# Altium PCB PCB-Lift_2022-01-25.pcbdoc (part 2 of 2)
Units mil, origin at the board's own origin, x right, y up, seen from the top; angles counter-clockwise.
Board outline 4947.01 x 4952.29 mil, 2 copper layers (Top Layer, Bottom Layer); 137 components, 143 nets, 538 pads, 141 vias.
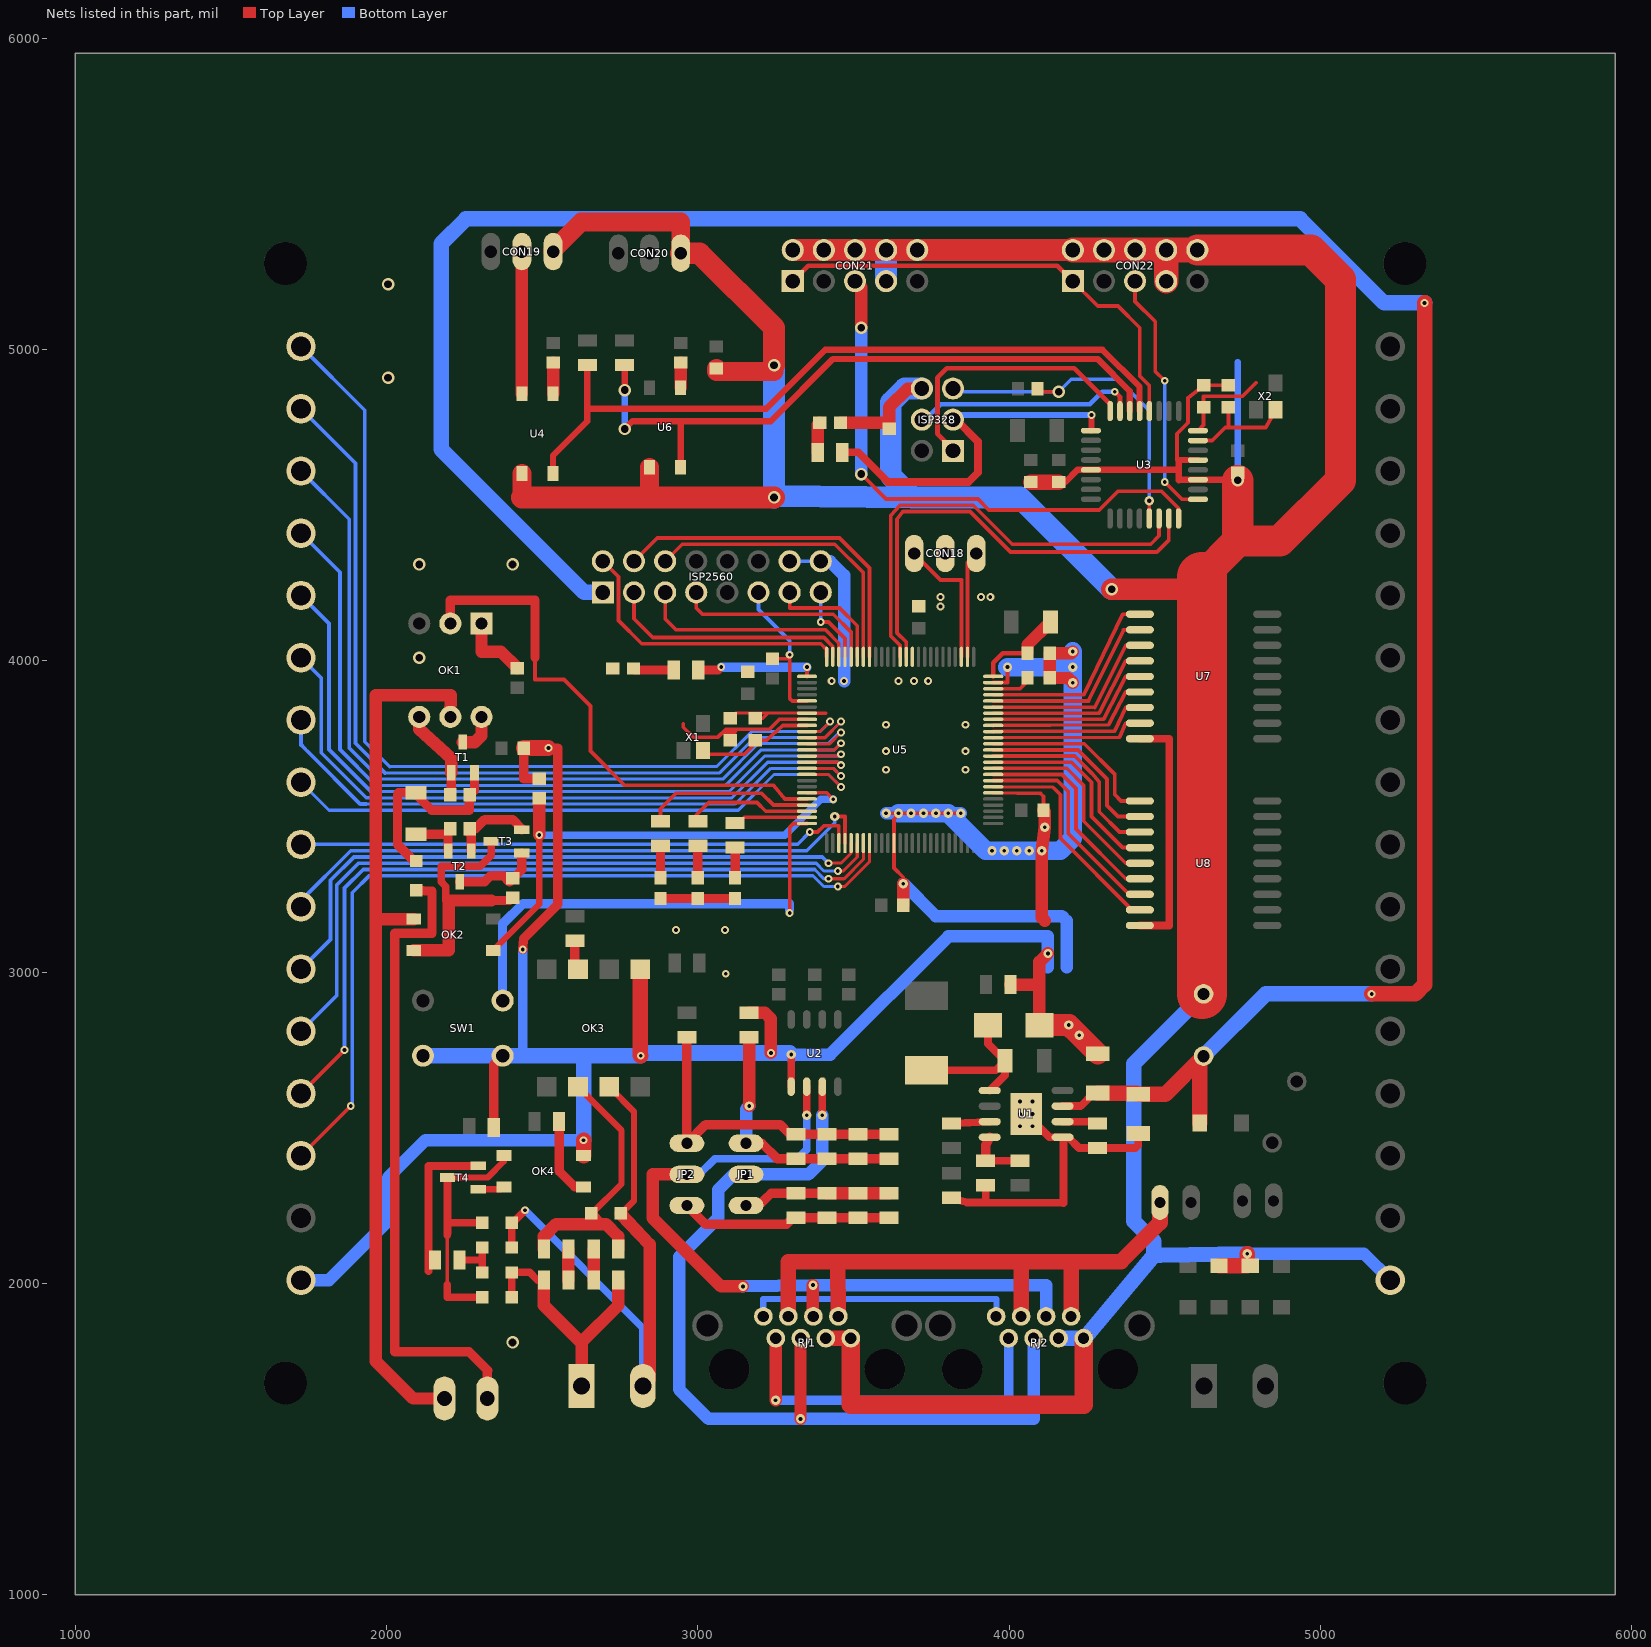
[diagram p2: the nets of this part, all layers, seen from the top]

## Via types
v1: diameter 25, hole 12, Top Layer to Bottom Layer, tented both sides, 62 vias
v2: diameter 30, hole 12, Top Layer to Bottom Layer, tented both sides, 54 vias
v3: diameter 40, hole 25, Top Layer to Bottom Layer, tented both sides, 24 vias
v4: diameter 30, hole 15, Top Layer to Bottom Layer, tented both sides, 1 vias

## Nets (pads, with @x,y where several pads share a name; then routed paths per layer and width w, separated by ;. In a path a pad name is that pad's centre, name@x,y a point inside that pad or via, vN(x,y) a via of type N, cw(c..) or ccw(c..) an arc to the next point about the centre after c; other vN are vias at no path point) (continued)
GND: C1.2 C2.1 C3.2 C5.1 C6.1 C7.1 C8.1 C9.1 C10.1 C11.1 C12.1 C13.1 C14.1 C15.1 C16.2 C17.1 C18.1 C19.1 C20.1 C21.1 C22.1 C23.1 CON8.2 CON9.1 CON18.2 CON19.3 CON20.3 CON21.2 CON21.4 CON21.6 CON21.7 CON21.8 CON21.10 CON22.2 CON22.4 CON22.6 CON22.7 CON22.8 CON22.10 D1.2 D3.2 D6.2 ISP328.6 ISP2560.14 ISP2560.16 LED1.2 LED2.2 LED3.2 LED4.2 LED5.2 OK3.5 OK4.2 R2.1 R4.2 R20.1 R34.2 RJ1.1 RJ1.3 RJ2.1 RJ2.3 SW1.1 SW1.2 U1.5 U1.9 U2.5 U3.3 U3.5 U3.21 U4.3 U5.11 U5.32 U5.62 U5.81 U5.99 U6.3 U7.9 U8.9 | length 27954
  Top Layer w10: C14.1@3105,3815.72 3121.47,3832.18 U5.32@3350.83,3832.17 ; C13.1@3185,3815.72 3209.1,3815.71 3225.57,3832.18
  Top Layer w12: U5.32@3350.83,3832.17 3410,3832.18 ; v2(3605,3510.28) v2(3645,3510.28) ; v2(3660.43,3284.35) 3660.43,3304.85 3630.35,3334.93 U5.62@3630.35,3414.85 3630,3490.28 v2(3645,3510.28) ; v2(3845,3510.28) v2(3805,3510.28) v2(3765,3510.28) v2(3725,3510.28) v2(3685,3510.28) v2(3645,3510.28) ; U5.81@3949.25,3576.27 4100.75,3574.3 ; U5.99@3949.25,3930.61 3995,3930.61 v2(3995,3980.28) ; 4105,3570.28 4110.43,3564.85 C10.1@4110.43,3520.28 ; 4540,4645.28 4540,4730.28 4575,4765.28 4575,4845.28 C17.1@4625,4885.72 C18.1@4705,4885.72
  Top Layer w20: C23.1@4160,4574.85 4180.57,4574.85 4220,4614.28 U3.21@4263,4614.28 4545,4614.28 ; U3.5@4607,4645.28 4545,4645.28 4545,4580.28 4547.1,4582.38 U3.3@4607,4582.38 4705,4582.38 4727.47,4604.85 C19.1@4735,4604.85
  Top Layer w25: U2.5@3300,2632.41 v2(3300,2735.28) ; C5.1@3815,2272.78 3865,2260.28 3925,2260.28 R2.1@3925,2315.28 ; 3927,2259.65 4175,2258.28 4175,2466.66 U1.5@4172,2469.65 ; U1.9@4055,2544.65 4130,2469.65 U1.5@4172,2469.65 ; C2.1@4414.99,2481.69 4415,2444.65 4405.63,2435.28 R4.2@4285,2435.28 4225,2435.28 4190.63,2469.65 U1.5@4172,2469.65 ; U8.9@4420.28,3150.28 4515,3150.28 4515,3750.28 U7.9@4420.28,3750.28
  Top Layer w30: C15.1@2344.37,2500.28 2344.37,2703.05 SW1.1@2373,2731.68 ; v1(2437.5,3072.78) 2440,3107.78 2550,3217.78 2550,3720.28 v1(2520,3720.28) ; C16.2@2440.43,3720.28 2440.43,3621.78 R34.2@2490.8,3621.78 ; LED4.2@2880,3236.78 LED3.2@3000,3236.78 LED5.2@3120,3236.78
  Top Layer w40: R20.1@3165,2869.65 3215.63,2869.65 3235,2850.28 v1(3235,2740.28) ; LED2.2@3458.5,4765.28 C20.1@3600,4765.28 ; C20.1@3615,4745.72 3615,4765.28 3615,4815.28 3675,4875.28 ISP328.6@3720,4875.28 ; C7.1@3660.43,3215.28 v2(3660.43,3284.35) ; C6.1@4004.37,2960.28 4097.68,2960.28 ; D6.2@4097.68,2830.28 4097.68,3032.96 v2(4125,3060.28) ; C10.1@4110.43,3520.28 4115,3515.71 v2(4115,3465.28) v2(4105,3390.28) 4105,3175.28 4115,3165.28 ; v2(4205,3930.28) 4190,3945.28 C12.1@4130.43,3945.28 C11.1@4130.43,4025.28 4200,4025.28 v2(4205,4030.28)
  Top Layer w50: C16.2@2440.43,3720.28 v1(2520,3720.28) ; OK4.2@2632.95,2410.28 v1(2632.95,2460.28) ; OK3.5@2815,3009.26 2815,2733.05 v1(2816.36,2731.68) ; RJ1.3@3411.3,1823.94 RJ1.1@3491.61,1823.94 ; C22.1@4070,4574.85 C23.1@4160,4574.85 ; D3.2@4675,2057.21 4765,2057.22 v2(4765,2095.28)
  Top Layer w60: 2435.01,4525.28 U4.3@2435,4602.33 ; CON19.3@2535,5315.28 2535,5320.28 2625,5410.28 2945,5410.28 CON20.3@2945,5310.28 ; U6.3@2845,4622.33 2845.01,4535.28 2855.01,4525.28 ; C21.1@3060,4939.85 3060,4930.28 3245,4930.28 ; RJ1.1@3491.6,1823.95 3491.6,1609.65 4239.6,1609.65 RJ2.1@4239.6,1823.95
  Top Layer w70: 2435,4525.28 v3(3245,4525.28) ; CON20.3@2945,5310.28 3005,5310.28 3245,5070.28 v3(3245,4950.28) ; CON21.2@3305,5320.28 CON21.4@3405,5320.28 CON21.6@3505,5320.28 CON21.8@3605,5320.28 CON21.10@3705,5320.28 CON22.2@4205,5320.28 ; D6.2@4097.68,2830.28 4192.13,2830.28 4192.25,2830.4 v2(4225.25,2797.4) C3.2@4285,2737.65 ; v3(4330,4230.28) 4620,4230.28
  Top Layer w80: CON22.2@4205,5320.28 CON22.4@4305,5320.28 CON22.6@4405,5320.28 CON22.8@4505,5320.28 ; CON22.7@4505,5220.28 CON22.8@4505,5320.28 ; CON22.10@4605,5320.28 CON22.8@4505,5320.28
  Top Layer w100: CON22.10@4605,5320.28 4970,5320.28 5065,5225.28 5065,4580.28 4870,4385.28 4735,4385.28 ; 4620,4270.28 4735,4385.28 ; v3(4735,4580.28) 4735,4385.28
  Top Layer w160: C1.2@4620,2930.28 4620,4270.28
  Bottom Layer w12: ISP2560.14@3295,4320.28 ISP2560.16@3395,4320.28
  Bottom Layer w20: v3(4735,4580.28) 4735,4960.28
  Bottom Layer w30: 2437.5,2731.68 v1(2437.5,3072.78)
  Bottom Layer w40: CON8.2@1725,2010.28 1815,2010.28 2005,2200.28 2005,2340.28 2125,2460.28 v1(2632.95,2460.28) ; v2(3300,2735.28) 3425,2735.28 3805,3115.28 4125,3115.28 v2(4125,3060.28) 4125,3015.28 ; ISP2560.16@3395,4320.28 3425,4320.28 3470,4275.28 v1(3470,3935.28) ; v2(3605,3510.28) v2(3645,3510.28) ; v2(3660.43,3284.35) 3764.5,3180.28 4170,3180.28 4185,3165.28 4185,3015.28 ; v2(3805,3510.28) v2(3845,3510.28) ; v2(4765,2095.28) 5140,2095.28 CON9.1@5225,2010.28
  Bottom Layer w50: SW1.2@2117,2731.68 SW1.1@2373,2731.68 v1(2816.36,2731.68) 2824.96,2740.28 v1(3235,2740.28) 3295,2740.28 v2(3300,2735.28) ; v1(2632.95,2460.28) 2632.95,2731.68 ; RJ2.3@4159.33,1823.94 RJ2.1@4239.65,1823.94 ; RJ2.1@4239.64,1819.58 4465,2090.28 4465,2135.28 4400,2200.28 4400,2705.28 C1.2@4625,2930.28 ; 4485,2090.28 v2(4765,2095.28)
  Bottom Layer w60: v2(3645,3510.28) v2(3685,3510.28) v2(3725,3510.28) v2(3765,3510.28) v2(3805,3510.28) 3925,3390.28 v2(3945,3390.28) v2(3985,3390.28) v2(4025,3390.28) v2(4065,3390.28) v2(4105,3390.28) 4165,3390.28 4205,3430.28 v2(4205,3930.28) v2(4205,3980.28) ; v2(3995,3980.28) v2(4205,3980.28) ; v2(4205,4030.28) v2(4205,3980.28)
  Bottom Layer w70: v3(3245,4525.28) v3(3245,4950.28) ; v3@3245,4530.28 3690,4525.28 ; CON21.7@3605,5220.28 CON21.8@3605,5320.28 ; ISP328.6@3720,4875.28 3665,4875.28 3620,4830.28 3620,4595.28 3690,4525.28 ; v3(4330,4230.28) 4035,4525.28 3690,4525.28
  other v1: 3090,2995.28 2930,3135.28 3087.5,3135.28 3605,3650.28 3860,3650.28 3605,3710.28 3860,3710.28 3605,3795.28 3860,3795.28 3430,3935.28 3645,3935.28 3695,3935.28 3740,3935.28 3780,4175.28 3780,4205.28 3910,4205.28 3940,4205.28
  other v2: 4035,2504.65 4075,2504.65 4035,2544.65 4075,2544.65 4035,2584.65 4075,2584.65 4192.25,2830.4
  other v3: 2405,1810.28 2105,4010.28 2105,4310.28 2405,4310.28 2005,4910.28 2005,5210.28
GRBL-RX2560: U3.31 U5.12 | length 1478.6
  Top Layer w12: U5.12@3669.72,4013.27 3669.7,4060.58 3640,4090.28 3640,4455.28 3660,4480.28 3875,4480.28 4005,4350.28 4435,4350.28 4475,4350.28 4513.5,4388.78 U3.31@4513.5,4457.78
GRBL-TX2560: U3.30 U5.13 | length 1461.5
  Top Layer w12: U5.13@3650.04,4013.27 3650,4050.28 3620,4080.28 3620,4390.28 3620,4467.28 3650,4500.28 3885,4500.28 4010,4375.28 4455,4375.28 4482,4402.28 U3.30@4482,4457.78
J: D10.2 D12.1 PLUG1.1 R21.1 R23.1 | length 832
  Top Layer w24: D12.1@2402.24,1955.28 D10.2@2402.24,2035.28 2460,2035.28 2485,2010.28 R21.1@2505.63,2010.28
  Top Layer w40: R21.1@2505.63,2010.28 2505.63,1929.65 2625,1810.28 ; PLUG1.1@2626.57,1670.28 2626.58,1811.86 2744.37,1929.65 R23.1@2744.37,2010.28
JP1_3: JP1.3 R11.1 R12.1 R13.1 R14.1 R20.2 | length 824.9
  Top Layer w30: JP1.3@3155,2450.28 3205,2450.28 3255.6,2400.88 R11.1@3315,2400.91 R12.1@3415,2400.91 R13.1@3515,2400.91 R14.1@3615,2400.91
  Top Layer w40: v2(3165,2570.28) R20.2@3165,2790.91
  Bottom Layer w40: JP1.3@3155,2450.28 3155,2560.28 v2(3165,2570.28)
JP2_3: JP2.3 R11.2 R12.2 R13.2 R14.2 R19.1 | length 1028.2
  Top Layer w30: R19.1@2965,2790.91 JP2.3@2965,2450.28 3025,2510.28 3265,2510.28 3295.63,2479.65 R11.2@3315,2479.65 R12.2@3415,2479.65 R13.2@3515,2479.65 R14.2@3615,2479.65
K: D9.2 D11.2 D13.1 OK3.3 PLUG1.2 | length 1921.1
  Top Layer w20: OK3.3@2715,2631.31 2795,2551.31 2795,2265.88 D9.2@2752.2,2223.08
  Top Layer w24: D11.2@2402.24,2115.28 D13.1@2402.24,2195.28 2405,2195.28 v1(2445,2235.28)
  Top Layer w40: D9.2@2752.24,2225.28 2752.24,2223.04 2845,2125.28 2845,1691.85 PLUG1.2@2823.43,1670.28
  Bottom Layer w24: v1(2445,2235.28) 2823.43,1856.85 PLUG1.2@2823.43,1670.28
L1_1: C4.1 D6.1 L1.1 U1.1 | length 518.1
  Top Layer w25: L1.1@3735,2685.17 3956.89,2685.16 C4.1@3987.01,2715.28 ; D6.1@3932.32,2830.28 3932.33,2769.97 C4.1@3987.01,2715.28 ; U1.1@3938,2619.65 3987.01,2668.67 C4.1@3987.01,2715.28
L2_1: C11.2 L2.1 U5.100 | length 297.7
  Top Layer w15: U5.100@3949.3,3950.28 3949.3,3994.58 3980,4025.28 C11.2@4059.57,4025.28
  Top Layer w39.37: C11.2@4059.57,4025.28 4059.56,4051.84 L2.1@4132.99,4125.28
LED: R29.2 U5.26 | length 369.7
  Top Layer w12: U5.26@3350.83,3950.28 v1(3350.83,3980.28)
  Top Layer w30: R29.2@3001.06,3970.91 3065,3970.88
  Bottom Layer w30: v1(3075,3980.28) v1(3350.83,3980.28)
LED2_1: LED2.1 R37.1 | length 97.4
  Top Layer w40: R37.1@3385.63,4670.28 3385.63,4759.41 LED2.1@3391.5,4765.28
LED3_1: LED3.1 R7.1 | length 102.1
  Top Layer w30: LED3.1@3000,3303.78 R7.1@3000,3405.91
LED5_1: LED5.1 R35.1 | length 97.1
  Top Layer w30: LED5.1@3120,3303.78 R35.1@3120,3400.91
LED-BLUE: R6.2 U5.47 | length 548.1
  Top Layer w12: R6.2@2880,3484.65 2880,3525.28 2930,3575.28 3205,3575.28 3243.38,3536.9 U5.47@3350.83,3536.89
LED-GREEN: R7.2 U5.48 | length 406.7
  Top Layer w12: R7.2@3000,3484.65 3000,3500.28 2995,3505.28 3035,3545.28 3190,3545.28 3218.06,3517.22 U5.48@3350.83,3517.21
LED-YELLOW: R35.2 U5.49 | length 200.8
  Top Layer w12: R35.2@3150,3497.53 U5.49@3350.83,3497.52
LIMIT-X: R40.2 U3.13 U4.4 | length 2374.8
  Top Layer w20: U4.4@2535,4602.33 2535.01,4660.29 2645,4770.28 2645,4810.28 ; R40.2@2645,4950.91 2645,4810.28 ; U3.13@4419.5,4802.78 4419.5,4880.78 4300,5000.28 3409.6,5000.28 3219.6,4810.28 2645,4810.28
LIMIT-Y: R41.2 U3.14 U6.4 | length 2176.9
  Top Layer w20: v3(2765,4745.28) 2790,4770.28 2945,4770.28 ; v3(2765,4870.28) R41.2@2765,4950.91 ; U6.4@2945,4622.38 2945,4770.28 ; U3.14@4388,4802.78 4388,4867.28 4285,4970.28 3434.2,4970.28 3234.2,4770.28 2945,4770.28
  Bottom Layer w20: v3(2765,4745.28) v3(2765,4870.28)
MISO328: ISP328.1 U3.16 | length 893.3
  Top Layer w15: ISP328.1@3820,4675.28 3820,4680.28 3770,4730.28 3770,4910.28 3800,4940.28 4210,4940.28 4325,4825.28 U3.16@4325,4802.78
MOSI328: ISP328.4 U3.15 | length 726.6
  Top Layer w15: v1(4340,4865.28) 4356.5,4848.78 U3.15@4356.5,4802.78
  Bottom Layer w15: ISP328.4@3720,4775.28 3730,4775.28 3780,4825.28 4260,4825.28 4300,4865.28 v1(4340,4865.28)
N$10873: 
OK1_1: OK1.1 R30.2 | length 227.3
  Top Layer w40: OK1.1@2305,4120.28 2305,4029.98 2366.8,4029.98 R30.2@2420,3976.78
OK1_4: OK1.4 R31.1 T1.1 | length 297
  Top Layer w30: R31.1@2204.31,3570.28 2207.6,3573.58 T1.1@2207.6,3641.08
  Top Layer w40: OK1.4@2105,3820.28 2105,3780.28 2207.6,3687.68 T1.1@2207.6,3641.08
OK1_6: OK1.6 T1.3 | length 128.7
  Top Layer w40: T1.3@2245,3739.28 2284,3739.28 2305,3760.28 OK1.6@2305,3820.28
OK2_2: OK2.2 R32.2 T3.3 | length 907.8
  Top Layer w24: 2295,3230.29 2190.8,3230.29 2190.8,3275.29 2175.8,3290.29 2175.8,3340.29 2300.8,3340.29 2335.8,3375.29 T3.3@2335.8,3420.28
  Top Layer w30: 2335.8,3230.28 R32.2@2395,3230.28
  Top Layer w40: OK2.2@2087.1,3070.28 2200,3070.28 2200,3230.28 2335.8,3230.28
OK4_3: D12.2 D13.2 OK4.3 T4.3 | length 866.7
  Top Layer w12: 2195,1995.28 2195,2155.28
  Top Layer w20: T4.3@2195.8,2340.28 2325,2340.28 2377.05,2392.33 OK4.3@2377.05,2410.28
  Top Layer w24: 2195,1995.28 2195,1955.28 D12.2@2307.76,1955.28 ; 2195,2155.28 2195,2195.28 D13.2@2307.76,2195.28
  Top Layer w25: 2195,2195.28 2195.8,2196.09 ; 2195.8,2161.09 T4.3@2195.8,2340.28
OK4_4: OK4.4 T4.1 | length 85.9
  Top Layer w20: T4.1@2294.2,2302.88 2365,2302.88 2372.4,2310.28 OK4.4@2377.05,2310.28
PB0: ISP2560.6 U5.19 | length 967.9
  Top Layer w12: ISP2560.6@2895,4320.28 2950,4375.28 3440,4375.28 3531.93,4283.35 U5.19@3531.93,4013.27
PB1/SCK: ISP2560.13 U5.20 | length 390.7
  Top Layer w12: ISP2560.13@3295,4220.28 3295,4170.28 3455,4170.28 3512.24,4113.04 U5.20@3512.24,4013.27
PB2/MOSI: ISP2560.7 U5.21 | length 659.1
  Top Layer w12: ISP2560.7@2995,4220.28 2995,4170.28 3015,4150.28 3435,4150.28 3492.6,4092.68 U5.21@3492.56,4013.27
PB3/MISO: ISP2560.15 U5.22 | length 253.9
  Top Layer w12: v1(3395,4125.28) 3420,4125.28 3472.87,4072.41 U5.22@3472.87,4013.27
  Bottom Layer w12: v1(3395,4125.28) ISP2560.15@3395,4220.28
PB4: ISP2560.5 U5.23 | length 719.4
  Top Layer w12: ISP2560.5@2895,4220.28 2895,4135.28 2930,4100.28 3410,4100.28 3453.19,4057.09 U5.23@3453.19,4013.27
PB5: ISP2560.3 U5.24 | length 793.7
  Top Layer w12: ISP2560.3@2795,4220.28 2795,4135.28 2855,4075.28 3405,4075.28 3433.5,4046.78 U5.24@3433.5,4013.27
PB6: ISP2560.2 U5.25 | length 941.6
  Top Layer w12: ISP2560.2@2695,4320.28 2745,4270.28 2745,4130.28 2820,4055.28 3395,4055.28 3413.82,4036.46 U5.25@3413.82,4013.27
PC0: CON5.1 U5.53 | length 1808.1
  Top Layer w12: v1(3360,3450.28) 3385,3450.28 3405,3470.28 3453.2,3470.28 U5.53@3453.19,3414.85
  Bottom Layer w12: CON5.1@1725,3410.28 3321,3411.18 v1(3360,3450.28)
PC1: CON5.2 U5.54 | length 1976.8
  Top Layer w12: v2(3440,3500.28) 3472.87,3500.28 U5.54@3472.87,3414.85
  Bottom Layer w12: CON5.2@1725,3210.28 1725,3230.28 1885,3390.28 3350,3390.28 3440,3480.28 v2(3440,3500.28)
PC2: CON6.1 U5.55 | length 2081.8
  Top Layer w10: v1(3420,3350.28) 3460,3350.28 3492.56,3382.84 U5.55@3492.56,3414.85
  Bottom Layer w12: CON6.1@1725,3010.28 1820,3105.28 1820,3295.28 1895,3370.28 3370,3370.28 3400,3370.28 v1(3420,3350.28)
PC3: CON6.2 U5.56 | length 2292.6
  Top Layer w10: v1(3450,3325.28) 3467.5,3325.28 3512.24,3370.03 U5.56@3512.24,3414.85
  Bottom Layer w10: 3380,3350.28 3405,3325.28 v1(3450,3325.28)
  Bottom Layer w12: CON6.2@1725,2810.28 1840,2925.28 1840,3280.28 1910,3350.28 3380,3350.28
PC4: CON7.1 U5.57 | length 2500.5
  Top Layer w10: v1(3420,3300.28) 3470,3300.28 3531.93,3362.22 U5.57@3531.93,3414.85
  Top Layer w12: CON7.1@1725,2610.28 v1(1865,2750.28)
  Bottom Layer w10: 3375,3330.28 3405,3300.28 v1(3420,3300.28)
  Bottom Layer w12: v1(1865,2750.28) 1865,3270.28 1925,3330.28 3375,3330.28
PC5: CON7.2 U5.58 | length 2705.5
  Top Layer w10: v1(3450,3275.28) 3472.5,3275.28 3551.61,3354.39 U5.58@3551.61,3414.85
  Top Layer w12: CON7.2@1725,2410.28 v1(1885,2570.28)
  Bottom Layer w10: 3365,3310.28 3370,3310.28 3405,3275.28 v1(3450,3275.28)
  Bottom Layer w12: v1(1885,2570.28) 1890,2575.28 1890,3255.28 1945,3310.28 3365,3310.28
PF0: U5.97 U7.1 | length 633.7
  Top Layer w12: U5.97@3949.25,3891.24 4240,3891.24 4365,4150.28 U7.1@4420.28,4150.28
PF1: U5.96 U7.2 | length 610.2
  Top Layer w12: U5.96@3949.25,3871.55 3995,3871.55 4255,3871.55 4368,4100.28 4372,4100.28 ; 4375,4100.28 U7.2@4420.28,4100.28
PF2: U5.95 U7.3 | length 594.6
  Top Layer w12: U5.95@3949.25,3851.87 4275,3850.28 4375,4050.28 U7.3@4420.28,4050.28
PF3: U5.94 U7.4 | length 574.4
  Top Layer w12: U5.94@3949.25,3832.18 4290,3832.18 4375,4000.28 U7.4@4420.28,4000.28
PF4: U5.93 U7.5 | length 554.3
  Top Layer w12: U5.93@3949.3,3812.48 4304,3813.28 4375,3950.28 U7.5@4420.3,3950.28
PF5: U5.92 U7.6 | length 534.6
  Top Layer w12: U5.92@3949.25,3792.81 4320,3795.28 4375,3900.28 U7.6@4420.28,3900.28
PF6: U5.91 U7.7 | length 518.8
  Top Layer w12: U5.91@3949.3,3773.08 4340,3775.28 4375,3850.28 U7.7@4420.3,3850.28
PF7: U5.90 U7.8 | length 500.2
  Top Layer w12: U5.90@3949.3,3753.48 4355,3755.28 4375,3800.28 U7.8@4420.3,3800.28
PH6: ISP2560.4 U5.18 | length 1113.1
  Top Layer w12: ISP2560.4@2795,4320.28 2870,4395.28 3455,4395.28 3551.61,4298.67 U5.18@3551.61,4013.27
PK0: U5.89 U8.1 | length 585.1
  Top Layer w12: U5.89@3949.3,3733.78 4241.5,3733.78 4340,3635.28 4340,3570.28 4360,3550.28 U8.1@4420.3,3550.28
PK1: U5.88 U8.2 | length 609.4
  Top Layer w12: U5.88@3949.3,3714.08 4221.2,3714.08 4315,3620.28 4315,3535.28 4350,3500.28 U8.2@4420.3,3500.28
PK2: U5.87 U8.3 | length 629.4
  Top Layer w12: U5.87@3949.3,3694.38 4210.9,3694.38 4265,3640.28 4290,3610.28 4290,3515.28 4355,3450.28 U8.3@4420.3,3450.28
PK3: U5.86 U8.4 | length 649.1
  Top Layer w12: U5.86@3949.3,3674.68 4200.6,3674.68 4265,3610.28 4265,3500.28 4365,3400.28 U8.4@4420.3,3400.28
PK4: U5.85 U8.5 | length 664.6
  Top Layer w12: U5.85@3949.3,3654.98 4185.3,3654.98 4240,3600.28 4240,3485.28 4375,3350.28 U8.5@4420.3,3350.28
PK5: U5.84 U8.6 | length 685.9
  Top Layer w12: U5.84@3949.3,3635.28 4170,3635.28 4215,3590.28 4215,3460.28 4375,3300.28 U8.6@4420.3,3300.28
PK6: U5.83 U8.7 | length 701.4
  Top Layer w12: U5.83@3949.3,3615.68 4154.6,3615.68 4190,3580.28 4190,3445.28 4385,3250.28 U8.7@4420.3,3250.28
PK7: U5.82 U8.8 | length 710.4
  Top Layer w12: U5.82@3949.25,3595.96 4140.75,3594.61 ; 4145,3590.28 4165,3570.28 4165,3430.28 4395,3200.28 U8.8@4420.3,3200.28
PL0: CON1.1 U5.35 | length 3030.5
  Top Layer w10: U5.35@3350.83,3773.11 3392.84,3773.12 v1(3425,3805.28)
  Bottom Layer w10: 2010,3660.28 3060,3660.28 3172.8,3772.78 3392.5,3772.78 v1(3425,3805.28)
  Bottom Layer w12: CON1.1@1725,5010.28 1930,4805.28 1930,3740.28 2010,3660.28
PL1: CON1.2 U5.36 | length 2946.1
  Top Layer w10: U5.36@3350.83,3753.43 3408.16,3753.44 v1(3460,3805.28)
  Bottom Layer w10: 1995,3640.28 3070,3640.28 3183.2,3754.28 3409,3754.28 v1(3460,3805.28)
  Bottom Layer w12: CON1.2@1725,4810.28 1900,4635.28 1900,3735.28 1995,3640.28
PL2: CON2.1 U5.37 | length 2762.2
  Top Layer w10: U5.37@3350.83,3733.75 3423.47,3733.75 v1(3460,3770.28)
  Bottom Layer w10: 1980,3620.28 3080,3620.28 3193.5,3734.28 3419,3734.28 3455,3770.28 v1(3460,3770.28)
  Bottom Layer w12: CON2.1@1725,4610.28 1880,4455.28 1880,3720.28 1980,3620.28
PL3: CON2.2 U5.38 | length 2578.3
  Top Layer w10: U5.38@3350.83,3714.06 3438.79,3714.07 v1(3460,3735.28)
  Bottom Layer w10: 1980,3600.28 3090,3600.28 3203.8,3714.28 3439,3714.28 v1(3460,3735.28)
  Bottom Layer w12: CON2.2@1725,4410.28 1850,4285.28 1850,3715.28 1965,3600.28 1980,3600.28
PL4: CON3.1 U5.39 | length 2394.5
  Top Layer w10: U5.39@3350.83,3694.37 3454.1,3694.38 v1(3460,3700.28)
  Bottom Layer w10: 1955,3580.28 3100,3580.28 3214.1,3694.38 3454.1,3694.38 v1(3460,3700.28)
  Bottom Layer w12: CON3.1@1725,4210.28 1815,4120.28 1815,3715.28 1950,3580.28 1955,3580.28
PL5: CON3.2 U5.40 | length 2226.3
  Top Layer w10: U5.40@3350.83,3674.69 3450.58,3674.7 v1(3460,3665.28)
  Bottom Layer w10: 1945,3560.28 3110,3560.28 3224.4,3674.68 3450.6,3674.68 v1(3460,3665.28)
  Bottom Layer w12: CON3.2@1725,4010.28 1790,3945.28 1790,3705.28 1935,3560.28 1945,3560.28
PL6: CON4.1 U5.41 | length 2071.6
  Top Layer w10: U5.41@3350.83,3655 3435.27,3655.01 v1(3460,3630.28)
  Bottom Layer w10: 1935,3540.28 3120,3540.28 3234.7,3654.98 3435.3,3654.98 v1(3460,3630.28)
  Bottom Layer w12: 1725,3730.28 CON4.1@1725,3810.28 ; 1725,3731.39 1745,3710.28 1915,3540.28 1935,3540.28
PL7: CON4.2 U5.42 | length 1962.2
  Top Layer w10: U5.42@3350.83,3635.32 3419.95,3635.33 v1(3460,3595.28)
  Bottom Layer w10: CON4.2@1725,3610.28 1815,3520.28 3130,3520.28 3245,3635.28 3420,3635.28 v1(3460,3595.28)
R1_1: R1.1 R2.2 U1.4 | length 168.8
  Top Layer w25: R2.2@3925,2394.02 R1.1@4015,2394.02
  Top Layer w30: R2.2@3925,2394.02 3925,2444.65 U1.4@3938,2469.65
R3_2: R3.2 U1.3 | length 133.2
  Top Layer w25: R3.2@3825,2515.28 R3.2@3815,2514.02 U1.3@3938,2519.65
R4_1: R4.1 U1.6 | length 83
  Top Layer w25: U1.6@4172,2519.65 R4.1@4255,2519.65
R6_1: LED4.1 R6.1 | length 102.1
  Top Layer w30: LED4.1@2880,3303.78 R6.1@2880,3405.91
R18_1: JP1.1 R15.1 R16.1 R17.1 R18.1 | length 576
  Top Layer w30: JP1.1@3155,2250.28 3195,2250.28 3235.6,2289.68 R15.1@3315,2289.65 R16.1@3415,2289.65 R17.1@3515,2289.65
  Top Layer w40: R16.1@3415,2289.65 R17.1@3515,2289.65 R18.1@3615,2289.65
R18_2: JP2.1 R15.2 R16.2 R17.2 R18.2 | length 683.4
  Top Layer w30: JP2.1@2965,2250.28 3025,2190.28 3285,2190.28 3305.63,2210.91 R15.2@3315,2210.91 R16.2@3415,2210.91 R17.2@3515,2210.91 R18.2@3615,2210.91
R22_1: R21.2 R22.1 | length 100
  Top Layer w40: R21.2@2584.37,2010.28 R22.1@2584.37,2110.28
R24_1: R23.2 R24.1 | length 100
  Top Layer w40: R23.2@2665.63,2010.28 R24.1@2665.63,2110.28
R24_2: D9.1 OK3.2 R22.2 R24.2 | length 904.5
  Top Layer w20: OK3.2@2615,2631.31 2755,2491.31 2755,2320.28 2660,2225.28 D9.1@2657.76,2225.28
  Top Layer w40: R22.2@2505.63,2110.28 2505.63,2150.91 2545,2190.28 2685,2190.28 ; D9.1@2657.76,2225.28 2657.76,2217.52 2685,2190.28 ; R24.2@2744.37,2110.28 2744.37,2150.91 2705,2190.28 2685,2190.28
R25_1: OK3.7 R25.1 | length 95.8
  Top Layer w30: R25.1@2605,3100.91 2605,3019.26 OK3.7@2615,3009.26
R27_1: D10.1 D11.1 R27.1 | length 153.4
  Top Layer w24: R27.1@2234.37,2075.28 2297.76,2075.28 2307.76,2075.28 ; D10.1@2307.76,2035.28 D11.1@2307.76,2115.28
R28_1: OK4.1 R28.1 | length 377.4
  Top Layer w30: OK4.1@2632.9,2310.28 2605,2310.28 2555,2360.28 R28.1@2554.37,2520.28 ; R28.1@2554.37,2520.28 2554.37,2460.91 R28.1@2554.37,2520.28
R29_1: LED1.1 R29.1 | length 130.6
  Top Layer w30: LED1.1@2793.5,3975.28 2797.87,3970.91 R29.1@2922.32,3970.91
RESET: ISP2560.11 R5.1 U5.30 | length 496.1
  Top Layer w12: R5.1@3240,4006.78 3295,4006.78 ; v1(3295,4020.28) 3295,4006.78 ; U5.30@3350.8,3871.58 3303.3,3871.58 3295,3879.78 3295,4006.78
  Bottom Layer w12: ISP2560.11@3195,4220.28 3195,4165.28 3295,4065.28 v1(3295,4020.28)
RESET328: ISP328.5 R36.1 U3.29 | length 1112.5
  Top Layer w12: R36.1@4091.49,4875.28 4101.49,4865.28 v3(4160,4865.28) ; U3.29@4450.5,4457.78 v4(4450.5,4515.28)
  Bottom Layer w12: ISP328.5@3820,4875.28 3830,4865.28 v3(4160,4865.28) 4200,4905.28 4350,4905.28 4450.5,4804.79 v4(4450.5,4515.28)
RJ45-7: RJ1.7 RJ2.7 | length 1147.6
  Top Layer w40: v2(3250,1624.65) 3250.7,1625.35 RJ1.7@3250.7,1823.95
  Bottom Layer w30: v2(3250,1624.65) 3998.7,1624.65 RJ2.7@3998.7,1823.95
RJ45-8: RJ1.8 RJ2.8 | length 861.4
  Bottom Layer w20: RJ1.8@3210.5,1894.05 3210.5,1949.65 3960,1949.65 3960,1895.45 RJ2.8@3958.5,1894.05
RJ45-POWER: JP4.2 RJ1.2 RJ1.6 RJ2.2 RJ2.6 | length 2015.3
  Top Layer w50: RJ1.6@3290.83,1894.02 3290.82,2069.65 3450,2070.28 ; RJ1.2@3451.46,1894.02 3450,2070.28 ; RJ2.6@4038.86,1894.02 4038.86,2070.28 ; RJ2.2@4199.5,1894.08 4199.5,2070.28 ; JP4.2@4485,2260.28 4485,2195.28 4360,2070.28 4199.5,2070.28 ; 3450,2070.28 4199.5,2070.28
RS485A: JP2.2 RJ1.4 RJ2.4 U2.6 | length 2441.5
  Top Layer w25: v2(3350,2540.28) U2.6@3350,2632.41
  Top Layer w40: JP2.2@2965,2350.28 2855,2350.28 2855,2210.28 3075,1990.28 v2(3145,1990.28) ; v2(3370,1994.65) 3370,1895.17 RJ1.4@3371.14,1894.02
  Bottom Layer w24: JP2.2@2965,2350.28 JP2.2@2975,2360.28
  Bottom Layer w25: JP2.2@2965,2350.28 3005,2350.28 3055,2400.28 3305,2400.28 3320,2400.28 3350,2430.28 v2(3350,2540.28)
  Bottom Layer w40: v2(3145,1990.28) v2(3370,1994.65) 4119.2,1994.65 RJ2.4@4119.2,1894.05
RS485B: JP1.2 RJ1.5 RJ2.5 U2.7 | length 3000.9
  Top Layer w25: v2(3400,2540.28) U2.7@3400,2632.41
  Top Layer w40: v2(3330,1564.65) 3330,1822.96 RJ1.5@3330.98,1823.94
  Bottom Layer w40: v2(3400,2540.28) 3400,2395.28 3355,2350.28 JP1.2@3155,2350.28 3115,2350.28 3065,2300.28 3065,2210.28 2940,2085.28 2940,1659.65 3035,1564.65 v2(3330,1564.65) 4079,1564.65 RJ2.5@4079,1823.65
RS_R: CON17.1 OK1.5 OK2.1 | length 2864.5
  Top Layer w40: OK2.1@2087.05,3170.28 2035,3170.28 1985.8,3170.29 ; CON17.1@2186.1,1630.28 2085,1630.28 1965,1750.28 1965,3170.28 ; OK1.5@2205,3820.28 2205.8,3890.28 1965,3890.28 1965,3170.28 ; 1965,3170.28 1985.8,3170.28 ; 1965,3170.28 1985.8,3170.28
RS_RECEIVE: OK2.3 R34.1 U5.45 | length 1634.7
  Top Layer w12: U5.45@3350.83,3576.26 3414.01,3576.27 v1(3435,3555.28)
  Top Layer w20: OK2.3@2342.9,3070.28 2490.8,3218.18 v1(2490.8,3441)
  Top Layer w40: v1(2490.8,3441) R34.1@2490.8,3558.8
  Bottom Layer w24: v1(2490.8,3441) 2491.52,3440.28 3260,3440.28 3280,3440.28 3395,3555.28 v1(3435,3555.28)
RS_S: CON17.2 D8.1 | length 2065.4
  Top Layer w30: D8.1@2095,3263.08 2145.8,3260.28 2145.8,3125.28 2025.8,3125.28 2025.8,1780.28 2265,1780.28 2325,1720.28 2323.9,1719.18 CON17.2@2323.9,1630.28
RS_SEND: OK1.2 U5.46 | length 1721.8
  Top Layer w12: 2477,4011.68 2477,3940.28 2570,3940.28 2655,3855.28 2655,3710.28 2765,3600.28 3243,3600.28 3279.4,3556.28 U5.46@3350.8,3556.28
  Top Layer w30: OK1.2@2205,4120.72 2205,4195.29 2477,4195.29 2477,4011.72
RXD-MON: CON18.1 U5.2 | length 343.8
  Top Layer w12: U5.2@3866.58,4013.27 3866.58,4316.87 CON18.1@3895,4345.28
SCK328: ISP328.3 R37.2 U3.17 | length 1202.1
  Top Layer w20: U3.17@4263,4740.28 4265,4740.28 v1(4265,4790.28)
  Top Layer w25: R37.2@3464.37,4670.28 3515,4670.28 3610,4575.28 3870,4575.28 3900,4605.28 3900,4705.28 3830,4775.28 ISP328.3@3820,4775.28
  Bottom Layer w20: ISP328.3@3817.5,4775.28 3832.5,4790.28 v1(4265,4790.28)
STEP-ENABLE: CON21.1 CON22.1 U3.12 | length 1498.9
  Top Layer w12: CON22.1@4205,5220.28 4285,5140.28 4350,5140.28 4420,5070.28 4420,4915.28 4450.9,4884.38 U3.12@4450.9,4802.78
  Top Layer w15: CON21.1@3305,5220.28 3355,5270.28 4155,5270.28 CON22.1@4205,5220.28
STEP-X: CON21.5 U3.32 | length 1776.1
  Top Layer w12: v3(3525,4600.28) 3605,4520.28 3900,4520.28 3935,4485.28 4290,4485.28 4350,4545.28 4490,4545.28 4545,4490.28 U3.32@4545,4457.78
  Top Layer w40: CON21.5@3505,5220.28 3525,5200.28 v3(3525,5070.28)
  Bottom Layer w40: v3(3525,4600.28) v3(3525,5070.28)
STEP-Y: CON22.5 U3.1 | length 814.5
  Top Layer w12: CON22.5@4405,5220.28 4405,5155.28 4470,5090.28 4470,4930.28 v1(4500,4900.28) ; v1(4500,4575.28) 4555.9,4519.38 U3.1@4607,4519.38
  Bottom Layer w12: v1(4500,4575.28) v1(4500,4900.28)
T1_2: D7.2 D8.2 R31.2 T1.2 | length 631.9
  Top Layer w30: D8.2@2095,3357.53 2087.76,3357.53 2035,3410.28 2035,3570.28 2038.07,3577.21 D7.2@2095,3577.22 2095,3570.28 2145,3520.28 2265.8,3520.28 R31.2@2267.3,3570.28 2282.4,3585.39 T1.2@2282.4,3641.08
T2_1: R33.1 T2.1 T3.2 | length 271.4
  Top Layer w30: T2.1@2272.4,3389.48 2272.4,3440.28 2264.69,3448 2264.69,3460.28 2285,3460.28 2315,3490.28 2405,3490.28 2434.2,3461.08 T3.2@2434.2,3457.68
T2_2: D7.1 R33.2 T2.2 | length 174.3
  Top Layer w30: D7.1@2095,3443.35 R33.2@2195,3443.35 ; T2.2@2197.6,3389.48 2197.6,3440.75 R33.2@2195,3443.35 ; R33.2@2204.3,3460.28 R33.2@2195,3443.35
T2_3: R32.1 T2.3 T3.1 | length 285.6
  Top Layer w30: T2.3@2235,3291.08 2315.8,3291.08 2335,3310.28 2375,3310.28 2395,3289.97 2434.2,3329.17 T3.1@2434.2,3382.88
T4_2: R27.2 T4.2 | length 517.2
  Top Layer w25: 2135,2040.28 2135,2377.68 T4.2@2294.2,2377.68 ; 2135,2075.28 R27.2@2155.63,2075.28
TASTER: SW1.3 U5.50 | length 1538.2
  Top Layer w12: v1(3295,3190.28) 3295,3465.29 3307.6,3477.88 U5.50@3350.8,3477.88
  Bottom Layer w30: SW1.3@2372.5,2920.28 2372.5,3154.68 2438.1,3220.28 3294.5,3220.28 v1@3294.5,3201.68
TXD-MON: CON18.3 U5.3 | length 434.1
  Top Layer w12: CON18.3@3695,4345.28 3780,4260.28 3846.9,4260.28 U5.3@3846.89,4013.27
U3_7: C18.2 U3.7 X2.3 | length 364.8
  Top Layer w12: U3.7@4607,4708.28 4653,4708.28 4695,4750.28 4765,4750.28 4825,4750.28 X2.3@4856.5,4806.97 ; 4705,4750.28 C18.2@4705,4814.85
U3_8: C17.2 U3.8 X2.1 | length 304.4
  Top Layer w12: U3.8@4607,4739.78 4625,4757.78 C17.2@4625,4814.85 ; C17.2@4625,4814.88 4625,4850.28 4695,4850.28 4750.2,4850.28 X2.1@4793.5,4893.59
U4_1: R38.2 U4.1 | length 100.6
  Top Layer w40: U4.1@2535,4858.23 R38.2@2535,4958.79
U4_2: CON19.2 U4.2 | length 457.1
  Top Layer w40: U4.2@2435,4858.23 CON19.2@2435,5315.28
U5_33: C14.2 U5.33 X1.1 | length 533.3
  Top Layer w12: X1.1@2953.5,3798.59 2953.5,3786.78 2985,3755.28 3065,3755.28 3090,3780.28 3135,3780.28 ; C14.2@3105,3744.88 3085,3770.28 3117.7,3770.28 3125,3780.28 3230,3780.28 3262.2,3812.48 U5.33@3350.83,3812.49
U5_34: C13.2 U5.34 X1.3 | length 381.2
  Top Layer w12: X1.3@3016.5,3711.97 3033.3,3700.28 3150,3700.28 3185,3735.28 C13.2@3185,3744.88 ; C13.2@3185,3744.85 3215.44,3744.84 3220,3745.28 3220,3744.84 3272.53,3792.81 U5.34@3350.83,3792.8
U5_98: C12.2 U5.98 | length 130.3
  Top Layer w12: U5.98@3949.25,3910.92 4035,3910.92 4059.56,3935.48 C12.2@4059.57,3945.28
U6_1: R39.2 U6.1 | length 80.6
  Top Layer w40: U6.1@2945,4878.23 R39.2@2945,4958.79
V_IN: C1.1 C2.2 C3.1 D5.1 ISP2560.1 U1.7 | length 8413.6
  Top Layer w25: U1.7@4172,2569.65 4230,2569.65 4272.01,2611.66 C3.1@4285,2611.66
  Top Layer w50: C3.1@4285,2611.66 4410.99,2611.66 C2.2@4414.99,2607.68 4502.37,2607.66 C1.1@4625,2730.28 4613.07,2718.35 D5.1@4613.07,2515.28 ; v1(5165,2930.28) 5305,2930.28 5335,2960.28 v1(5335,5150.28)
  Bottom Layer w50: ISP2560.1@2695,4220.28 2635,4220.28 2175,4680.28 2175,5340.28 2255,5420.28 4935,5420.28 5205,5150.28 v1(5335,5150.28) ; C1.1@4625,2730.28 4825,2930.28 v1(5165,2930.28)
pads on no net: ISP2560.9 ISP2560.10 ISP2560.12 OK1.3 OK3.1 OK3.4 RJ1. RJ1.9 RJ1.10 RJ2. RJ2.9 RJ2.10 U1.2 U3.2 U3.11 U3.19 U3.22 U3.23 U3.24 U3.25 U3.26 U3.27 U3.28 U5.1 U5.4 U5.5 U5.6 U5.7 U5.8 U5.9 U5.14 U5.15 U5.16 U5.27 U5.28 U5.29 U5.43 U5.51 U5.52 U5.59 U5.60 U5.66 U5.67 U5.68 U5.69 U5.70 U5.71 U5.72 U5.73 U5.74 U5.75 U5.76 U5.77 U5.78 U5.79 U8.11 U8.12 X1.2 X1.4 X2.2 X2.4

## Polygon pours and split planes (outlines as drawn)
GND on Bottom Layer (solid): 2560.62,4471.22 2560.62,4491.22 2560.76,4471.23 3080.62,4471.22 3580.62,4471.22 3990.62,4471.22 3991.02,4471.22 3990.62,4471.22 3991.02,4471.22 4155,4309.81 4189.38,3009.35 2571.3,3013.05 2570.62,3013.1 2560.76,4471.23 2560.62,4471.22
GND on Bottom Layer (solid): 3825,3030.28 3505,2710.28 3505,2110.28 3465,2070.28 4385,2070.28 4465,2150.28 4985,2150.28 4985,3030.28 3825,3030.28
GND on Bottom Layer (solid): 4605,5000.28 4905,5000.28 4945,4960.28 4945,4780.28 4895,4730.28 4670,4730.28 4570,4750.28 4570,4980.28 4605,5000.28
GND on Bottom Layer (solid): 1505,4410.28 2505,4410.28 2505,2810.28 3105,2810.28 3105,1510.28 1505,1510.28
GND on Bottom Layer (solid): 1505,5410.28 5405,5410.28 5405,3010.28 4405,3010.28 4405,4410.28 4305,4510.28 1505,4510.28
GND on Top Layer (solid): 4570,4745.28 4650,4720.28 4640,4725.28 4675,4710.28 4695,4715.28 4890,4720.28 4945,4780.28 4945,4990.28 4915,5020.28 4605,5020.28 4570,4975.28
GND on Top Layer (solid): 2600,4465.28 2595,3905.28 3405,3905.28 3405,3600.28 2605,3600.28 2612.5,2932.78 4132.5,2932.78 4152.5,4312.78 3987.5,4472.78
GND on Top Layer (solid): 3905,3450.28 3905,3110.28 3585,3120.28 3585,2550.28 3705,2550.28 3705,2150.28 4345,2150.28 4345,2350.28 4705,2350.28 4705,2550.28 4705,3070.28 4545,3070.28 4545,3190.28 4525,3190.28 4525,3450.28
V_IN on Top Layer (solid): 4385,2830.28 4385,2390.28 4785,2390.28 4785,2830.28 4385,2830.28
GND on Top Layer (solid): 1505,5410.28 1505,4510.28 4305,4510.28 4405,4410.28 4405,3010.28 5405,3010.28 5405,4710.28 4560,4690.28 4545,5050.28 5025,5050.28 5025,4710.28 5405,4710.28 5405,5410.28 5305,5410.28
GND on Top Layer (solid): 1505,4410.28 2505,4410.28 2505,2810.28 3105,2810.28 3105,1510.28 1505,1510.28
GND on Top Layer (solid): 3390,3835.28 3390,3760.28 3285,3760.28 3285,3755.28 3165,3635.28 2870,3635.28 2865,3640.28 2865,3890.28 3400,3890.28

## Other copper
Top Layer:
  region net L1_1: 3665,2730.28 3890,2865.28 3980,2790.28 3985,2610.28 3975,2610.28 3910,2605.28 3805,2640.28 3665,2730.28
  rectangle net +5V: 3545,2960.28 3955,3100.28
  rectangle net L1_1: 3850,2645.28 3975.71,2795.28

## Silkscreen, mask and mechanical layers (free items; w line width, h text height)
Top Overlay:
  rectangle: 3045,2365.28 3075,2510.28
  rectangle: 3025,2440.28 3095,2457.78
  rectangle: 3045,2190.28 3075,2335.28
  rectangle: 3025,2361.53 3095,2379.03
  rectangle: 3025,2322.78 3095,2340.28
  rectangle: 3025,2237.78 3095,2255.28
  rectangle: 2405,5165.28 2465,5195.28
  rectangle: 2815,5160.28 2875,5190.28
  text "PCB V1.1" at 1955,5322.78 h35
  text "08/2020" at 1936.22,5257.83 h35 r4
  text "IN" at 1875,5170.28 h100 r90
  text "OUT" at 4905,5110.28 h100
  text "LIMIT X" at 2325,5060.28 h60
  text "LIMIT Y" at 2705,5060.28 h60
  text "1" at 1965,5005.28 h70 r180
  text "1" at 4965,5005.28 h70 r180
  text "STEPPER Y" at 4105,4950.28 h80
  text "STEPPER X" at 3205,4945.28 h80
  text "2" at 1965,4805.28 h70 r180
  text "2" at 4945,4805.28 h70 r180
  text "3" at 1965,4605.28 h70 r180
  text "3" at 4945,4605.28 h70 r180
  text "*" at 3949.29,4580.89 h80 r121
  text "07/2020" at 2344.93,4542.38 h60 r94
  text "TX" at 3655,4460.28 h40
  text "GND" at 3745,4460.28 h40
  text "RX" at 3875,4460.28 h40
  text "4" at 1985.57,4398.6 h70 r144
  text "4" at 4965.57,4398.6 h70 r144
  text "Liftdecoder" at 2235,4310.28 h100 r90
  text "AP" at 2385,4300.28 h100 r90
  text "Monitor" at 3985,4280.28 h60
  text "5" at 1965,4205.28 h70 r180
  text "5" at 4945,4205.28 h70 r180
  text "2560" at 3985,4200.28 h60
  text "RSbus-V5" at 2070,4155.28 h40
  text "*" at 2550,4050.28 h80 r180
  text "6" at 1961.95,4005.15 h70 r185
  text "6" at 4941.95,4005.15 h70 r185
  text "7" at 4945,3805.28 h70 r180
  text "7" at 1979.79,3802 h70 r155
  text "8" at 1965,3605.28 h70 r180
  text "8" at 4945,3605.28 h70 r180
  text "9" at 1961.95,3405.15 h70 r185
  text "9" at 4941.95,3405.15 h70 r185
  text "10" at 1945,3135.28 h70
  text "10" at 4905,3135.28 h70
  text "11" at 1980,2970.28 h70 r90
  text "11" at 4940,2970.28 h70 r90
  text "12" at 1945,2735.28 h70
  text "12" at 4905,2735.28 h70
  text "none:" at 3005,2625.78 h39
  text "middle node" at 2895,2580.78 h39
  text "13" at 1945,2535.28 h70
  text "3+2:First node" at 2855,2500.28 h40
  text "14" at 1945,2335.28 h70
  text "14" at 4905,2335.28 h70
  text "Power" at 4540,2305.28 h70
  text "RS485" at 2917.5,2210.28 h65 r90
  text "+" at 1926.72,2208.57 h80 r225
  text "+" at 4906.72,2198.57 h80 r225
  text "1+2:Last node" at 2865,2130.28 h40
  text "RS485" at 4430,2115.28 h50
  text "Intern" at 4715,2115.28 h50
  text "-" at 1990,1980.28 h70 r90
  text "-" at 4980,1970.28 h70 r90
  text "J" at 2605,1905.28 h70 r180
  text "K" at 2825,1905.28 h70 r180
  text "R" at 2155,1855.28 h70 r180
  text "S" at 2305,1855.28 h70 r180
  text "5V" at 1645,1730.28 h100
  text "5V" at 5155,1730.28 h100
  text "18V" at 4995,1670.28 h60
  text "AC" at 4995,1590.28 h60
  text "Power" at 5005,1510.28 h60

## Text inside footprints (layer, text, board x,y; h text height)
CON17: Top Overlay "1" at 2170.35,1776.58 h40 r180; Top Overlay "2" at 2308.15,1776.58 h40 r180
CON18: Top Overlay "1" at 3960,4425.28 h50 r180; Top Overlay "3" at 3605,4425.28 h50 r180
CON19: Top Overlay "5V" at 2190,5340.28 h50 r270; Top Overlay "GND" at 2650,5270.28 h30 r90
CON20: Top Overlay "5V" at 2630,5330.28 h30 r270; Top Overlay "GND" at 3080,5240.28 h50 r90
JP1: Top Overlay "1" at 3230,2254.78 h39 r180; Top Overlay "2" at 3225,2354.78 h39 r180; Top Overlay "3" at 3225,2454.78 h39 r180
JP2: Top Overlay "1" at 3230,2254.78 h39 r180; Top Overlay "2" at 3225,2354.78 h39 r180; Top Overlay "3" at 3225,2454.78 h39 r180